# Altium PCB flatsat_2_PCB.PcbDoc (part 2 of 6)
Units mil, origin at the board's own origin, x right, y up, seen from the top; angles counter-clockwise.
Board outline 15748.03 x 9842.52 mil, 4 copper layers (Top Layer, FlatSat GND, FlatSat VCC, Bottom Layer), stack 82.765 mil thick; 155 components, 191 nets, 1391 pads, 1634 vias.
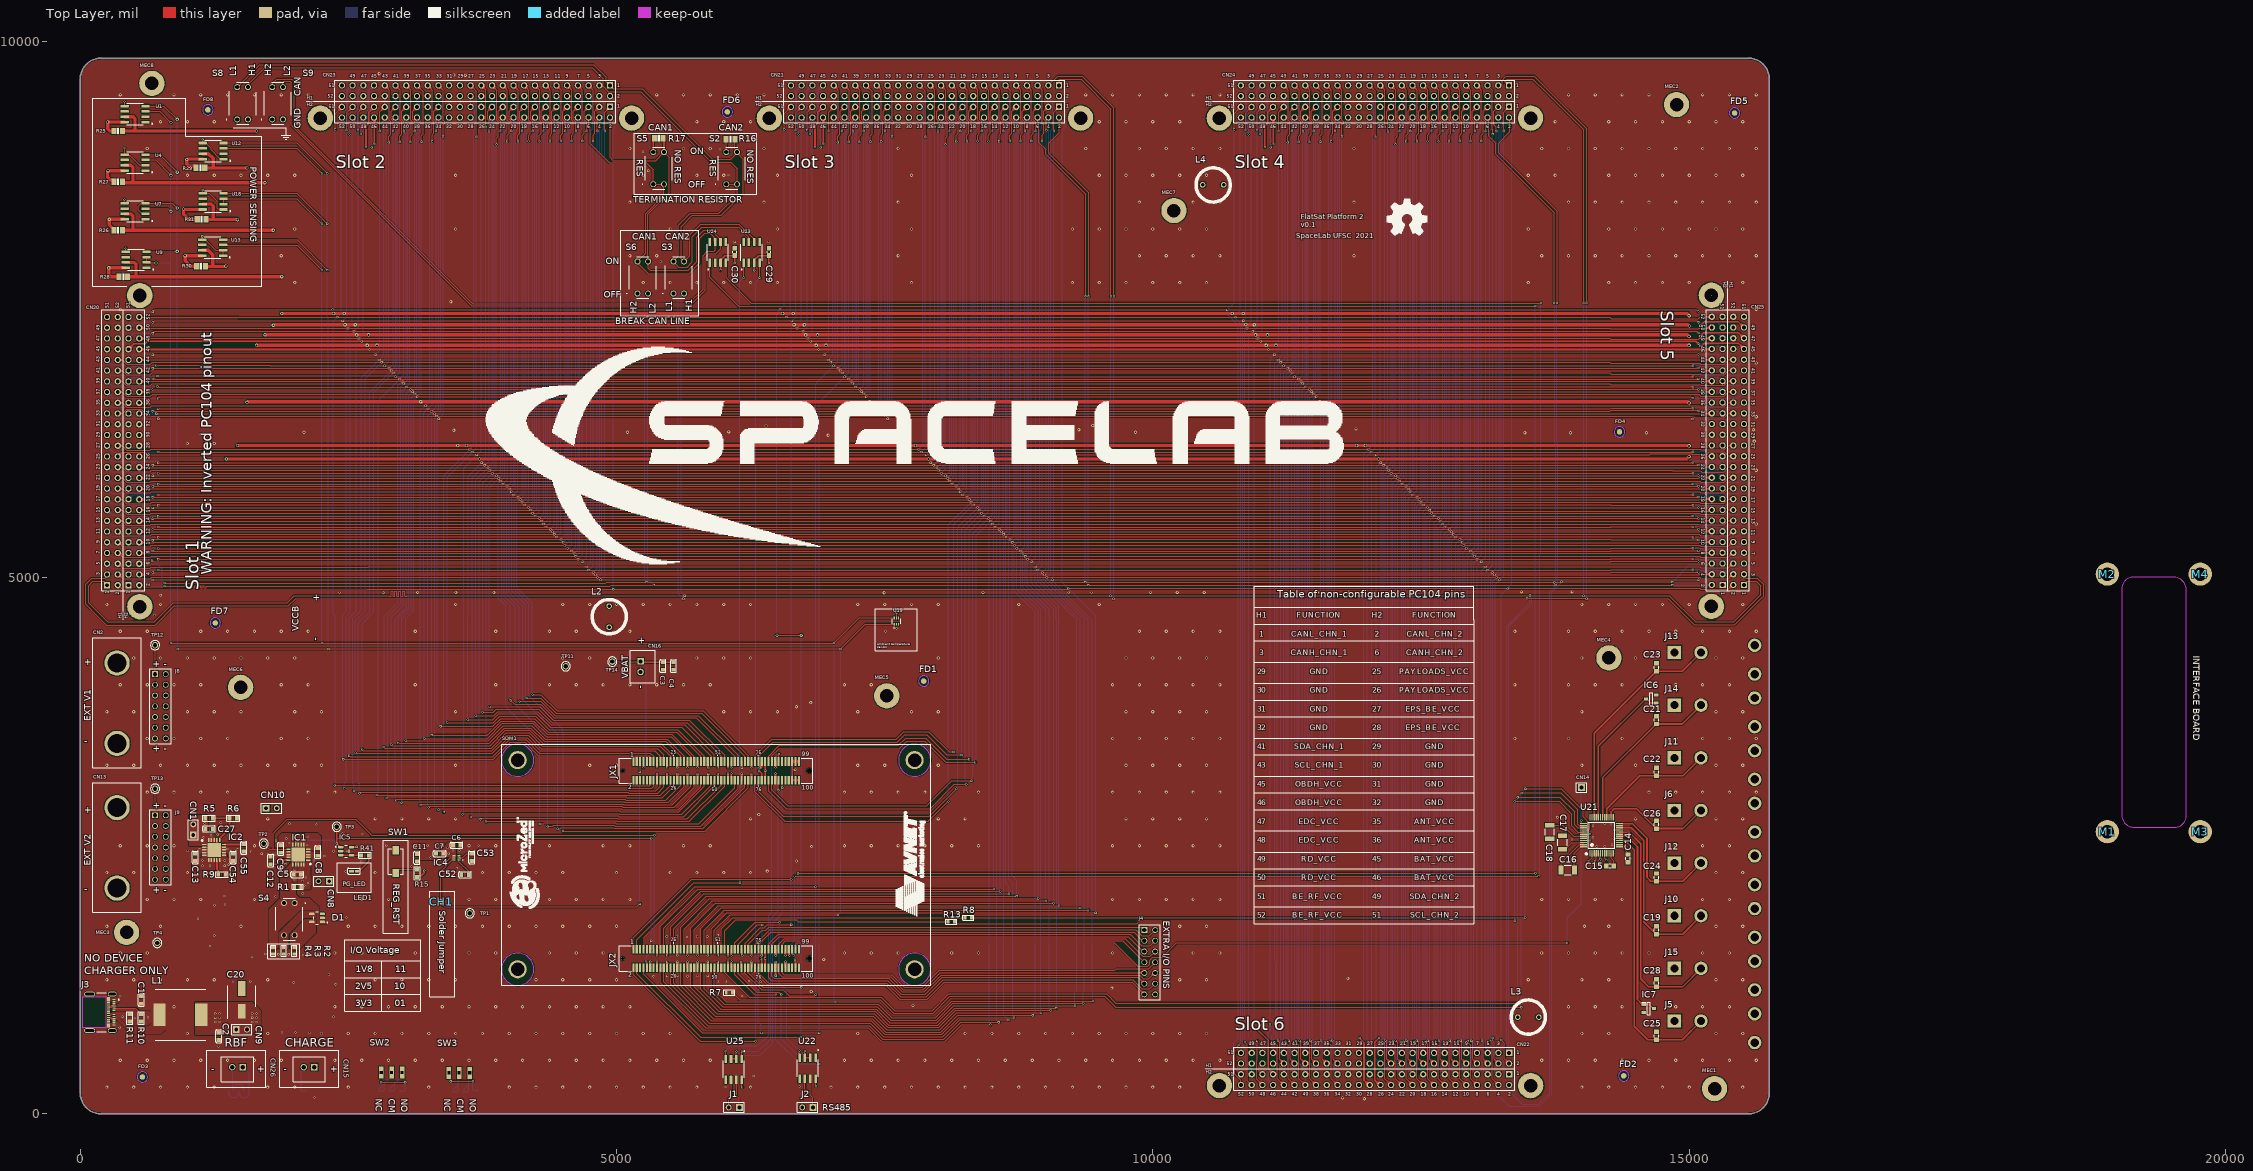
[diagram p0: Top Layer view]

## Part data (continued)
J3: library part CMP-04767-000004-1, "CONN RCP USB3.1 TYPEC 24P SMD RA", Current Rating=0.25/1.25/5A, Manufacturer=Molex, Package=0, Temperature="-30°C to +85°C", Temperature Range High=+85°C, Temperature Range Low=-30°C, Voltage Rating=30V, Automotive=No, Category=Conn, ComponentLink2Description=Datasheet, ComponentLink2URL=https://www.molex.com/webdocs/datasheets/pdf/en-us/1054500101_IO_CONNECTORS.pdf, Conn Orientation="Right Angle", Contact Material=Gold,Nickel, Device Class L1=Connectors, Device Class L2="USB Connectors", Device Class L3=unset, Digikey Description="CONN RCP USB3.1 TYPEC 24P SMD RA", Footprint Url=https://www.molex.com/pdm_docs/sd/1054500101_sd.pdf, Height=3.44mm, Is Female=yes, Lead Free=Yes, Manufacturer Part Number=1054500101, Mouser Description="USB Shielded I/O Receptacle; Type C; Right Angle; Surface Mount; Gold over Nickel", Number of Contacts=24, Octopart=https://octopart.com/105450-0101-molex-68082325, Pitch=0.5mm, RoHS=TRUE, Shielding=true, Usb Standard="USB 3.1"
J4 J8 J9: "Connector Header Surface Mount 14 position 0.079 _2.00mm_", Manufacturer Part Number=TSW-107-05-F-D, Package=None, Availability=Unavailable, MF=Molex, Price=None, SnapEDA_Link=https://www.snapeda.com/parts/87832-1420/Molex/view-part/78740/?ref=snap
J5 J6 J10 J11 J12 J13 J14 J15: library part PCC-SMP-V-K, "Soquete de termopar especial PCCS para placa de circuito em série", ComponentLink1Description=Datasheet, ComponentLink1URL=https://assets.omega.com/spec/PCC-OST-SMP_spec.pdf
L1: "Inductor", Manufacturer_Name="Wurth Elektronik", Mouser Part Number=710-742792901, Manufacturer_Part_Number=742792901, Mouser Price/Stock=https://www.mouser.co.uk/ProductDetail/Wurth-Elektronik/742792901?qs=8K4tMJJn4OFrhST66k9YRg%3D%3D
L2 L3 L4: "3.3ÂµH Unshielded Wirewound Inductor 5.5A 25mOhm Max Radial, Vertical Cylinder", Package="Radial Bourns - J.W. Miller", Availability=Good, Check_prices=https://www.snapeda.com/parts/RL622-3R3K-RC/Bourns/view-part/337281/?ref=eda, Manufacturer Part Number=RL622-3R3K-RC, MF=Bourns, Price=None, Purchase-URL=https://pricing.snapeda.com/search/part/RL622-3R3K-RC/?ref=eda, SnapEDA_Link=https://www.snapeda.com/parts/RL622-3R3K-RC/Bourns/view-part/337281/?ref=snap
M1 M2 M3 M4: "Mechanical Hole for FloripaSat-2 interface boards"
MEC1 MEC2 MEC3 MEC4 MEC5 MEC6 MEC7 MEC8: library part "M3 hole", "M3 hole"
R1 R15: "RES 47K OHM 1/10W 1% 0603", Manufacturer="Stackpole Electronics Inc", Power=1/10W, Supplier Part Number 1=RMCF0603FT47K0CT-ND, Tolerance=1%, Mount Type=SMD, Supplier 1=Digi-Key
R2: "Resistor", Manufacturer_Name=Panasonic, Mouser Part Number=667-ERJ-PB3B2492V, Datasheet Link=https://www.mouser.com/ProductDetail/Panasonic/ERJ-PB3B2492V?qs=RYIBGgAklzKijK5IgOR%2FVg%3D%3D, Height=0.55mm, Manufacturer_Part_Number=ERJ-PB3B2492V, Mouser Price/Stock=https://www.mouser.co.uk/ProductDetail/Panasonic/ERJ-PB3B2492V?qs=RYIBGgAklzKijK5IgOR%2FVg%3D%3D
R3 R4: "Resistor", Manufacturer_Name=Panasonic, Datasheet Link=http://industrial.panasonic.com/cdbs/www-data/pdf/RDQ0000/ast-ind-151033.pdf
  R3: Manufacturer_Part_Number=ERJH3ED3652V
  R4: Manufacturer_Part_Number=ERJ-H3ED3652V
R5 R9: "RES 3.57K OHM 1/10W 1% 0603", Manufacturer="Stackpole Electronics Inc", Power=1/10W, Supplier Part Number 1=RMCF0603FT3K57CT-ND, Tolerance=1%, Mount Type=SMD, Supplier 1=Digi-Key, Supplier 2=Newark, Supplier Part Number 2=89M6753
R6: "Resistor", Manufacturer_Name="TE Connectivity", Mouser Part Number=279-CPF0603F1K15C1, Datasheet Link=https://www.te.com/commerce/DocumentDelivery/DDEController?Action=srchrtrv&DocNm=8-1773459-4_ELEVATOR_ESCALATOR_SOLUTIONS&DocType=Data%20Sheet&DocLang=English&PartCntxt=6-1879336-8&DocFormat=pdf, Height=0.55mm, Manufacturer_Part_Number=CPF0603F1K15C1, Mouser Price/Stock=https://www.mouser.co.uk/ProductDetail/TE-Connectivity-Holsworthy/CPF0603F1K15C1?qs=8G8kQhBkhGik2Xy5fY9yCw%3D%3D
R7 R8 R13: "RES SMD 50 OHM 1% 1/10W 0603", Manufacturer="Vishay Dale", Power=1/10W, Supplier Part Number 1=541-3318-1-ND, Tolerance=1%, Mount Type=SMD, Supplier 1=Digi-Key
R10 R11: "RES 5.1K OHM 1/10W 1% 0603", Manufacturer="Stackpole Electronics Inc", Power=1/10W, Supplier Part Number 1=RMCF0603FT5K10CT-ND, Tolerance=1%, Mount Type=SMD, Supplier 1=Digi-Key
R16 R17: library part R120R_1%_1/4W_0805, "RES 120R OHM 1/8W 1% 0805", Manufacturer Part Number=CRGCQ0805F120R, NCM=8533.21.20
R25 R26 R27 R28 R29 R30 R31: library part RDNP_0805, "RES DNP 0805", Manufacturer Part Number=UR73V2ATTD47L0F, NCM=8533.21.20
R41: "RES SMD 240 OHM 1% 1/10W 0603", Manufacturer=Yageo, Power=1/10W, Supplier Part Number 1=9330860, Tolerance=1%, Mount Type=SMD, Supplier 1=Farnell, Supplier 2=Digi-Key, Supplier 3=Newark, Supplier Part Number 2=311-240HRCT-ND, Supplier Part Number 3=65T8389
S2 S3 S4 S5 S6 S8 S9: "Switch", Manufacturer_Name=Apem, Mouser Part Number=642-NDS02V, Datasheet Link=https://componentsearchengine.com/Datasheets/2/NDS02V.pdf, Height=7.05mm, Manufacturer_Part_Number=NDS02V, Mouser Price/Stock=https://www.mouser.co.uk/ProductDetail/Apem/NDS02V?qs=Rt2YTNbomKgQBAMS%252Bs5rFQ%3D%3D
SOM1: library part MicroZed_SOM, "MicroZed SOM Carrier Footprint", Manufacturer Part Number=61083-101400LF
SW1: "SWITCH TACTILE SPST-NO 0.05A 12V", Manufacturer="Wurth Electronics Inc.", Supplier Part Number 1=2459527, Action=Momentary, Circuit=SPST, Mount Type=SMD, Supplier 1=Farnell, Supplier 2=Digi-Key, Supplier 3=Farnell, Supplier 4=Digi-Key, Supplier 5=Farnell, Supplier 6=Farnell, Supplier Part Number 2=732-7054-1-ND, Supplier Part Number 3=9471898, Supplier Part Number 4=732-7054-6-ND, Supplier Part Number 5=2079577, Supplier Part Number 6=2079521
TP1 TP2 TP3 TP4 TP11 TP12 TP13 TP14: library part "Test Point PTH", "TEST POINT PAD"
U1 U4 U7 U9 U12 U13 U18: "26V, 12-bit, i2c output current/voltage/power monitor 8-SOIC -40 to 125", Package="SOIC-8 Texas Instruments", Availability=Warning, Check_prices=https://www.snapeda.com/parts/INA219AID/Texas%20Instruments/view-part/522322/?ref=eda, Manufacturer Part Number=INA219AID, MF="Texas Instruments", Price=None, Purchase-URL=https://pricing.snapeda.com/search/part/INA219AID/?ref=eda, SnapEDA_Link=https://www.snapeda.com/parts/INA219AID/Texas%20Instruments/view-part/522322/?ref=snap
U19: "0.5C 1.4V to 3.6V digital temperature sensor with I2C/SMBus in 2.56mm2 package 6-SOT-5X3 -40 to 125", Package="SOT-5X3-6 Texas Instruments", Availability=Good, DigiKey-Purchase-URL=https://snapeda.com/shop?store=DigiKey&id=237309, Manufacturer Part Number=TMP112AIDRLT, MF="Texas Instruments", Mouser-Purchase-URL=https://snapeda.com/shop?store=Mouser&id=237309, Price=None, SnapEDA_Link=https://www.snapeda.com/parts/TMP112AIDRLT/Texas%20Instruments/view-part/237309/?ref=snap, Texas_Instruments-Purchase-URL=https://snapeda.com/shop?store=Texas+Instruments&id=237309
U21: "IC SENSOR THERMAL", Package="LQFP -48 Analog Devices", Manufacturer Part Number=LTC2983CLX#PBF, MF="Analog Devices", SnapEDA_Link=https://www.snapeda.com/parts/LTC2983CLX%23PBF/Analog%20Devices/view-part/2895071/?ref=snap
U22 U25: "1/1 Transceiver Half RS422, RS485 8-SOIC", Manufacturer Part Number=ISL83483IBZ-T, Package="SOIC-8 Intersil", Availability=Unavailable, MF="Renesas Electronics", Price=None, SnapEDA_Link=https://www.snapeda.com/parts/ISL83483IBZ-T/Renesas%20Electronics%20America%20Inc./view-part/482105/?ref=snap
U23 U24: "3.3 V CAN Transceiver", Package="SOIC-8 Texas Instruments", Availability=Unavailable, DigiKey-Purchase-URL=https://snapeda.com/shop?store=DigiKey&id=230614, Manufacturer Part Number=SN65HVD232D, MF="Texas Instruments", Mouser-Purchase-URL=https://snapeda.com/shop?store=Mouser&id=230614, Price=None, SnapEDA_Link=https://www.snapeda.com/parts/SN65HVD232D/Texas%20Instruments/view-part/230614/?ref=snap, Texas_Instruments-Purchase-URL=https://snapeda.com/shop?store=Texas+Instruments&id=230614

## Via types
v1: diameter 20, hole 11.81, Top Layer to Bottom Layer, tented both sides, 872 vias
v2: diameter 30, hole 15, Top Layer to Bottom Layer, 690 vias
v3: diameter 30, hole 17.72, Top Layer to Bottom Layer, tented both sides, 72 vias

## Nets (pads, with @x,y where several pads share a name; then routed paths per layer and width w, separated by ;. In a path a pad name is that pad's centre, name@x,y a point inside that pad or via, vN(x,y) a via of type N, cw(c..) or ccw(c..) an arc to the next point about the centre after c; other vN are vias at no path point)
+5V: C2.1 C6.1 C7.1 C8.1 C9.1 C13.1 C20.1 C54.1 CN9.1 CN9.2 IC1.5 IC1.6 IC1.7 IC1.8 IC1.10 IC2.5 IC2.6 IC2.7 IC2.8 IC2.10 IC2.11 IC4.4 IC5.5 L1.2 R9.1 R15.1 SOM1.JX1-57 SOM1.JX1-58 SOM1.JX1-59 SOM1.JX1-60 SOM1.JX2-12 SOM1.JX2-57 SOM1.JX2-58 SOM1.JX2-59 SOM1.JX2-60 TP4.1 | length 684.8
  Top Layer w8: SOM1.JX2-12@5314.96,1362.2 v1(5314.96,1419.7)
  Top Layer w15: IC5.5@2528.54,2487.2 2574.43,2487.2 2577.39,2490.16 v1(2578.74,2490.16) ; R15.1@3141.73,2209.09 3151.95,2219.31 3179.94,2219.31 3208.66,2248.03 v1(3208.66,2267.72) ; C6.1@3474.63,2505.26 C6.1@3474.84,2505.47 ; SOM1.JX2-58@6039.37,1362.2 v1(6039.37,1421.26) ; v1(6039.37,1476.38) SOM1.JX2-57@6039.37,1535.43 ; SOM1.JX1-58@6039.37,3112.2 v1(6039.37,3173.23) ; v1(6039.37,3228.35) SOM1.JX1-57@6039.37,3285.43 ; SOM1.JX2-60@6070.86,1362.2 v1(6070.87,1421.26) ; v1(6070.87,1476.38) SOM1.JX2-59@6070.87,1535.43 ; SOM1.JX1-60@6070.86,3112.2 v1(6070.87,3173.23) ; v1(6070.87,3227.94) SOM1.JX1-59@6070.87,3285.43
  other v1: 1259.84,856.3 1299.21,856.3 1604.81,856.78 1644.18,856.78 1259.84,895.67 1299.21,895.67 1604.81,896.15 1644.18,896.15 1259.84,935.04 1299.21,935.04 1604.81,935.52 1644.18,935.52 1141.73,2312.99 1210.63,2312.99 1348.43,2312.99 1385.83,2322.83 1141.73,2362.2 1348.43,2362.2 3437.01,2429.13 3476.38,2456.69 3425.2,2480.32 2120.92,2507.36 1945.87,2526.57 1921.26,2566.93 2118.11,2582.68
+RBF: CN6.2 CN6.4 CN26.1 | length 616.7
  Top Layer w15: CN26.1@1515.75,436.22 CN26.1@1530.51,421.46
  Bottom Layer w11: CN6.4@1382.87,214.57 1390.92,206.52 1390.92,174.04 1407.48,157.48 1456.69,157.48 1473.25,174.04 1473.25,190.77 CN6.2@1481.3,198.82 ; CN6.2@1481.3,214.57 CN6.2@1481.3,198.82 ; CN26.1@1515.75,436.22 1574.8,377.17 1574.8,177.17 1555.12,157.48 1505.91,157.48 1491.55,171.84 1491.55,188.57 CN6.2@1481.3,198.82
-RBF: CN6.1 CN6.3 CN26.2 | length 419.4
  Bottom Layer w11: CN26.2@1417.32,436.22 1424.7,428.84 1424.7,221.95 CN6.3@1432.09,214.57 1442.33,224.81 1442.33,261.23 1456.69,275.59 1505.91,275.59 1520.26,261.23 1520.26,224.81 CN6.1@1530.51,214.57
BTN_SENSE: C11.2 IC4.5 R15.2 SW1.1 | length 693.5
  Top Layer w9.84: SW1.1@2942.91,2246.06 2942.91,2254.49 2967.52,2279.09 R15.2@3141.73,2279.09 3141.73,2350.39 C11.2@3139.76,2352.36 3415.35,2352.36 3450.35,2387.36 IC4.5@3486.22,2387.36
  Top Layer w15: SW1.1@2942.91,2246.06 2942.91,2236.22 SW1.1@2964.94,2214.19
CAN_CHN_1_N: CN23.1 R16.1 S2.3 S3.3 S8.4 U23.6 | length 7723
  Top Layer w8: S8.4@1464.96,9571.65 1674.04,9780.73 4786.43,9780.73 4904.16,9663 4904.16,9618.4 4908.84,9613.72 4914.63,9613.72 CN23.1@4940.16,9588.19 4965.69,9562.66 4965.69,9561.41 4970.37,9556.72 5239.57,9556.72 5898.65,8897.64 6062.99,8897.64 6123.62,8958.27 6181.1,8900.79 6181.1,8582.45 6013.95,8415.3 5975.01,8376.36 5708.17,8376.36 5604.55,8272.74 5604.55,7973.8 S3.3@5630.71,7947.64 5685.2,8002.12 5685.2,8195.04 5785.87,8295.72 6141.49,8295.72 6273.69,8163.52 6277.03,8163.52 6279.53,8161.02 U23.6@6279.53,8129.92 ; R16.1@6102.99,9084.65 6102.99,8998.02 S2.3@6123.62,8977.39
  Top Layer w15: S2.3@6123.62,8966.54 S2.3@6123.62,8977.39
CAN_CHN_1_P: CN23.3 S2.1 S2.2 S3.4 S8.3 U23.7 | length 7606.5
  Top Layer w8: S8.3@1564.96,9571.65 1572.53,9579.22 1572.53,9604.03 1721.23,9752.73 4774.83,9752.73 4876.16,9651.4 4876.16,9604.29 4869.82,9597.96 4849.93,9597.96 CN23.3@4840.16,9588.19 4849.93,9578.42 4875.3,9578.42 4925,9528.72 5227.97,9528.72 5744.49,9012.2 5786.86,8969.83 ; S3.4@5530.71,7947.64 5576.55,7993.48 5576.55,8283.24 5688.98,8395.67 5954.72,8395.67 6123.62,8564.57 S2.2@6123.62,8666.54 ; S3.4@5531.5,7942.91 5580.71,7893.7 5659.45,7893.7 5708.66,7942.91 5708.66,8179.13 5797.24,8267.72 6137.8,8267.72 6230.89,8174.62 6230.89,8139.19 U23.7@6240.16,8129.92 ; 5786.97,8969.72 5884.05,8872.64 6062.99,8872.64 6123.62,8812.01 S2.2@6123.62,8666.54 ; S2.1@6023.62,8666.54 S2.2@6112.2,8666.54 ; S2.2@6114.61,8664.13 S2.2@6112.2,8666.54 ; S2.2@6112.2,8666.54 S2.2@6123.62,8666.54
CAN_CHN_2_N: CN23.54 R17.1 S5.3 S6.3 S9.3 U24.6 | length 8958.5
  Top Layer w7.99: 5858.27,8019.69 5925.2,8019.69 5969.88,8064.37 U24.6@5969.88,8128.74
  Top Layer w8: S9.3@1889.76,9566.93 1889.76,9617.9 1897.85,9625.98 1956.9,9625.98 1968.5,9614.38 1968.5,9215.14 3650.47,7533.18 5682.79,7533.18 5826.77,7677.17 5826.77,7988.19 5858.27,8019.69 ; CN23.54@4940.16,9288.19 4940.16,8918.11 4970.47,8887.8 5364.17,8887.8 S5.3@5442.91,8966.54 5492.13,8917.32 5492.13,8588.36 5289.59,8385.83 S6.3@5289.59,7958.44 ; S6.3@5295.28,7947.64 5295.28,7883.86 5314.96,7864.17 5669.29,7864.17 5748.03,7942.91 5748.03,8171.69 5812.14,8235.79 5886.45,8235.79 5958.72,8163.52 5962.07,8163.52 5969.88,8155.71 U24.6@5969.88,8128.74
  Top Layer w15: R17.1@5433.7,9094.49 5442.91,9085.28 S5.3@5442.91,8966.54
CAN_CHN_2_P: CN23.58 S5.1 S5.2 S6.4 S9.4 U24.7 | length 8836.8
  Top Layer w7.99: S9.4@1791.34,9571.65 1791.56,9571.87 1791.56,9606.52 1830.71,9645.67 1978.35,9645.67 1996.5,9627.51 ; 5389.38,8666.94 S5.2@5442.51,8666.94 ; 5807.09,7687.01 5807.09,7999.92 5847.91,8040.75 5912.47,8040.75 5921.26,8049.53 U24.7@5921.26,8114.91
  Top Layer w8: 1996.5,9627.51 1996.5,9212.6 3657.92,7551.18 5671.26,7551.18 5807.09,7687.01 ; CN23.58@4740.16,9288.19 4740.16,9206.69 4753.94,9192.91 4753.94,9045.28 4931.1,8868.11 5275.59,8868.11 5342.91,8800.79 S5.1@5342.91,8666.54 5386.25,8666.54 ; S6.4@5195.28,7947.64 5271.59,8023.95 5271.59,8393.28 5442.91,8564.61 S5.2@5442.91,8660.28 ; S6.4@5197.09,7933.07 5208.75,7921.41 5208.75,7921.17 5295.28,7834.65 5679.13,7834.65 5777.56,7933.07 5777.56,8161.62 5823.73,8207.79 5875.83,8207.79 5912.46,8171.15 5912.46,8136.16 U24.7@5919.88,8128.74
CH1: C25.2 J5.2 U21.16 | length 2564.2
  Top Layer w11.81: U21.16@14350.39,2549.21 14388.63,2549.21 14399.61,2549.21
  Top Layer w15: 14399.61,2549.21 14488.19,2460.63 14488.19,816.93 14613.19,691.93 C25.2@14694.88,691.93 14935.99,691.93 J5.2@15110.24,866.18
CH3: IC7.1 IC7.3 U21.18 | length 1819.9
  Top Layer w11.81: U21.18@14350.39,2588.58 14388.63,2588.58 14419.29,2588.58
  Top Layer w15: 14419.29,2588.58 14517.72,2490.16 14517.72,1066.93 14558.68,1025.96 14570.49,1025.96 IC7.1@14576.77,1019.69 14627.95,1019.69 14665.35,982.28 IC7.3@14671.26,982.28

## Text inside footprints (layer, text, board x,y; h text height)
CN22: Top Overlay "3" at 13210.6,639.42 h29.53; Top Overlay "5" at 13110.6,639.42 h29.53; Top Overlay "7" at 13015.6,639.42 h29.53; Top Overlay "9" at 12910.6,639.42 h29.53; Top Overlay "11" at 12805.6,639.42 h29.53; Top Overlay "13" at 12700.6,639.42 h29.53; Top Overlay "15" at 12600.6,639.42 h29.53; Top Overlay "17" at 12505.6,639.42 h29.53; Top Overlay "19" at 12400.6,639.42 h29.53; Top Overlay "21" at 12305.6,639.42 h29.53; Top Overlay "23" at 12200.6,639.42 h29.53; Top Overlay "25" at 12100.6,639.42 h29.53; Top Overlay "27" at 12000.6,639.42 h29.53; Top Overlay "29" at 11900.6,639.42 h29.53; Top Overlay "31" at 11800.6,639.42 h29.53; Top Overlay "33" at 11700.6,639.42 h29.53; Top Overlay "35" at 11595.6,639.42 h29.53; Top Overlay "37" at 11505.6,639.42 h29.53; Top Overlay "39" at 11400.6,639.42 h29.53; Top Overlay "41" at 11300.6,639.42 h29.53; Top Overlay "43" at 11195.6,639.42 h29.53; Top Overlay "45" at 11095.6,639.42 h29.53; Top Overlay "47" at 11000.6,639.42 h29.53; Top Overlay "49" at 10895.6,639.42 h29.53; Top Overlay "4" at 13210.6,169.42 h29.53; Top Overlay "6" at 13110.6,169.42 h29.53; Top Overlay "8" at 13010.6,169.42 h29.53; Top Overlay "10" at 12895.6,169.42 h29.53; Top Overlay "12" at 12795.6,169.42 h29.53; Top Overlay "14" at 12695.6,169.42 h29.53; Top Overlay "16" at 12595.6,169.42 h29.53; Top Overlay "18" at 12495.6,169.42 h29.53; Top Overlay "20" at 12395.6,169.42 h29.53; Top Overlay "22" at 12295.6,169.42 h29.53; Top Overlay "24" at 12195.6,169.42 h29.53; Top Overlay "26" at 12100.6,169.42 h29.53; Top Overlay "28" at 11995.6,169.42 h29.53; Top Overlay "30" at 11895.6,169.42 h29.53; Top Overlay "32" at 11795.6,169.42 h29.53; Top Overlay "34" at 11695.6,169.42 h29.53; Top Overlay "36" at 11595.6,169.42 h29.53; Top Overlay "38" at 11495.6,169.42 h29.53; Top Overlay "40" at 11395.6,169.42 h29.53; Top Overlay "42" at 11295.6,169.42 h29.53; Top Overlay "44" at 11195.6,169.42 h29.53; Top Overlay "46" at 11095.6,169.42 h29.53; Top Overlay "48" at 10995.6,169.42 h29.53; Top Overlay "50" at 10895.6,169.42 h29.53; Top Overlay "51" at 10700.6,554.42 h29.53; Top Overlay "52" at 10690.6,454.42 h29.53; Top Overlay "51" at 10700.6,354.42 h29.53; Top Overlay "52" at 10795.6,169.42 h29.53; Top Overlay "2" at 13315.6,169.42 h29.53; Top Overlay "1" at 13390.6,359.42 h29.53; Top Overlay "1" at 13390.6,554.42 h29.53; Top Overlay "2" at 13390.6,454.42 h29.53; Top Overlay "H2" at 10495.6,374.42 h29.53; Top Overlay "H1" at 10495.6,434.42 h29.53
CN23: Top Overlay "3" at 4829.17,9658.19 h29.53; Top Overlay "5" at 4729.17,9658.19 h29.53; Top Overlay "7" at 4634.17,9658.19 h29.53; Top Overlay "9" at 4529.17,9658.19 h29.53; Top Overlay "11" at 4424.17,9658.19 h29.53; Top Overlay "13" at 4319.17,9658.19 h29.53; Top Overlay "15" at 4219.17,9658.19 h29.53; Top Overlay "17" at 4124.17,9658.19 h29.53; Top Overlay "19" at 4019.17,9658.19 h29.53; Top Overlay "21" at 3924.17,9658.19 h29.53; Top Overlay "23" at 3819.17,9658.19 h29.53; Top Overlay "25" at 3719.17,9658.19 h29.53; Top Overlay "27" at 3619.17,9658.19 h29.53; Top Overlay "29" at 3519.17,9658.19 h29.53; Top Overlay "31" at 3419.17,9658.19 h29.53; Top Overlay "33" at 3319.17,9658.19 h29.53; Top Overlay "35" at 3214.17,9658.19 h29.53; Top Overlay "37" at 3124.17,9658.19 h29.53; Top Overlay "39" at 3019.17,9658.19 h29.53; Top Overlay "41" at 2919.17,9658.19 h29.53; Top Overlay "43" at 2814.17,9658.19 h29.53; Top Overlay "45" at 2714.17,9658.19 h29.53; Top Overlay "47" at 2619.17,9658.19 h29.53; Top Overlay "49" at 2514.17,9658.19 h29.53; Top Overlay "4" at 4829.17,9188.19 h29.53; Top Overlay "6" at 4729.17,9188.19 h29.53; Top Overlay "8" at 4629.17,9188.19 h29.53; Top Overlay "10" at 4514.17,9188.19 h29.53; Top Overlay "12" at 4414.17,9188.19 h29.53; Top Overlay "14" at 4314.17,9188.19 h29.53; Top Overlay "16" at 4214.17,9188.19 h29.53; Top Overlay "18" at 4114.17,9188.19 h29.53; Top Overlay "20" at 4014.17,9188.19 h29.53; Top Overlay "22" at 3914.17,9188.19 h29.53; Top Overlay "24" at 3814.17,9188.19 h29.53; Top Overlay "26" at 3719.17,9188.19 h29.53; Top Overlay "28" at 3614.17,9188.19 h29.53; Top Overlay "30" at 3514.17,9188.19 h29.53; Top Overlay "32" at 3414.17,9188.19 h29.53; Top Overlay "34" at 3314.17,9188.19 h29.53; Top Overlay "36" at 3214.17,9188.19 h29.53; Top Overlay "38" at 3114.17,9188.19 h29.53; Top Overlay "40" at 3014.17,9188.19 h29.53; Top Overlay "42" at 2914.17,9188.19 h29.53; Top Overlay "44" at 2814.17,9188.19 h29.53; Top Overlay "46" at 2714.17,9188.19 h29.53; Top Overlay "48" at 2614.17,9188.19 h29.53; Top Overlay "50" at 2514.17,9188.19 h29.53; Top Overlay "51" at 2319.17,9573.19 h29.53; Top Overlay "52" at 2309.17,9473.19 h29.53; Top Overlay "51" at 2319.17,9373.19 h29.53; Top Overlay "52" at 2414.17,9188.19 h29.53; Top Overlay "2" at 4934.17,9188.19 h29.53; Top Overlay "1" at 5009.17,9378.19 h29.53; Top Overlay "1" at 5009.17,9573.19 h29.53; Top Overlay "2" at 5009.17,9473.19 h29.53; Top Overlay "H2" at 2114.17,9393.19 h29.53; Top Overlay "H1" at 2114.17,9453.19 h29.53
CN24: Top Overlay "3" at 13209.49,9658.19 h29.53; Top Overlay "5" at 13109.49,9658.19 h29.53; Top Overlay "7" at 13014.49,9658.19 h29.53; Top Overlay "9" at 12909.49,9658.19 h29.53; Top Overlay "11" at 12804.49,9658.19 h29.53; Top Overlay "13" at 12699.49,9658.19 h29.53; Top Overlay "15" at 12599.49,9658.19 h29.53; Top Overlay "17" at 12504.49,9658.19 h29.53; Top Overlay "19" at 12399.49,9658.19 h29.53; Top Overlay "21" at 12304.49,9658.19 h29.53; Top Overlay "23" at 12199.49,9658.19 h29.53; Top Overlay "25" at 12099.49,9658.19 h29.53; Top Overlay "27" at 11999.49,9658.19 h29.53; Top Overlay "29" at 11899.49,9658.19 h29.53; Top Overlay "31" at 11799.49,9658.19 h29.53; Top Overlay "33" at 11699.49,9658.19 h29.53; Top Overlay "35" at 11594.49,9658.19 h29.53; Top Overlay "37" at 11504.49,9658.19 h29.53; Top Overlay "39" at 11399.49,9658.19 h29.53; Top Overlay "41" at 11299.49,9658.19 h29.53; Top Overlay "43" at 11194.49,9658.19 h29.53; Top Overlay "45" at 11094.49,9658.19 h29.53; Top Overlay "47" at 10999.49,9658.19 h29.53; Top Overlay "49" at 10894.49,9658.19 h29.53; Top Overlay "4" at 13209.49,9188.19 h29.53; Top Overlay "6" at 13109.49,9188.19 h29.53; Top Overlay "8" at 13009.49,9188.19 h29.53; Top Overlay "10" at 12894.49,9188.19 h29.53; Top Overlay "12" at 12794.49,9188.19 h29.53; Top Overlay "14" at 12694.49,9188.19 h29.53; Top Overlay "16" at 12594.49,9188.19 h29.53; Top Overlay "18" at 12494.49,9188.19 h29.53; Top Overlay "20" at 12394.49,9188.19 h29.53; Top Overlay "22" at 12294.49,9188.19 h29.53; Top Overlay "24" at 12194.49,9188.19 h29.53; Top Overlay "26" at 12099.49,9188.19 h29.53; Top Overlay "28" at 11994.49,9188.19 h29.53; Top Overlay "30" at 11894.49,9188.19 h29.53; Top Overlay "32" at 11794.49,9188.19 h29.53; Top Overlay "34" at 11694.49,9188.19 h29.53; Top Overlay "36" at 11594.49,9188.19 h29.53; Top Overlay "38" at 11494.49,9188.19 h29.53; Top Overlay "40" at 11394.49,9188.19 h29.53; Top Overlay "42" at 11294.49,9188.19 h29.53; Top Overlay "44" at 11194.49,9188.19 h29.53; Top Overlay "46" at 11094.49,9188.19 h29.53; Top Overlay "48" at 10994.49,9188.19 h29.53; Top Overlay "50" at 10894.49,9188.19 h29.53; Top Overlay "51" at 10699.49,9573.19 h29.53; Top Overlay "52" at 10689.49,9473.19 h29.53; Top Overlay "51" at 10699.49,9373.19 h29.53; Top Overlay "52" at 10794.49,9188.19 h29.53; Top Overlay "2" at 13314.49,9188.19 h29.53; Top Overlay "1" at 13389.49,9378.19 h29.53; Top Overlay "1" at 13389.49,9573.19 h29.53; Top Overlay "2" at 13389.49,9473.19 h29.53; Top Overlay "H2" at 10494.49,9393.19 h29.53; Top Overlay "H1" at 10494.49,9453.19 h29.53
CN25: Top Overlay "H1" at 15376.23,7757.28 h29.53 r270; Top Overlay "H2" at 15316.23,7757.28 h29.53 r270; Top Overlay "2" at 15396.23,4862.28 h29.53 r270; Top Overlay "1" at 15496.23,4862.28 h29.53 r270; Top Overlay "1" at 15301.23,4862.28 h29.53 r270; Top Overlay "2" at 15111.23,4937.28 h29.53 r270; Top Overlay "52" at 15111.23,7457.28 h29.53 r270; Top Overlay "51" at 15296.23,7552.28 h29.53 r270; Top Overlay "52" at 15396.23,7562.28 h29.53 r270; Top Overlay "51" at 15496.23,7552.28 h29.53 r270; Top Overlay "50" at 15111.23,7357.28 h29.53 r270; Top Overlay "48" at 15111.23,7257.28 h29.53 r270; Top Overlay "46" at 15111.23,7157.28 h29.53 r270; Top Overlay "44" at 15111.23,7057.28 h29.53 r270; Top Overlay "42" at 15111.23,6957.28 h29.53 r270; Top Overlay "40" at 15111.23,6857.28 h29.53 r270; Top Overlay "38" at 15111.23,6757.28 h29.53 r270; Top Overlay "36" at 15111.23,6657.28 h29.53 r270; Top Overlay "34" at 15111.23,6557.28 h29.53 r270; Top Overlay "32" at 15111.23,6457.28 h29.53 r270; Top Overlay "30" at 15111.23,6357.28 h29.53 r270; Top Overlay "28" at 15111.23,6257.28 h29.53 r270; Top Overlay "26" at 15111.23,6152.28 h29.53 r270; Top Overlay "24" at 15111.23,6057.28 h29.53 r270; Top Overlay "22" at 15111.23,5957.28 h29.53 r270; Top Overlay "20" at 15111.23,5857.28 h29.53 r270; Top Overlay "18" at 15111.23,5757.28 h29.53 r270; Top Overlay "16" at 15111.23,5657.28 h29.53 r270; Top Overlay "14" at 15111.23,5557.28 h29.53 r270; Top Overlay "12" at 15111.23,5457.28 h29.53 r270; Top Overlay "10" at 15111.23,5357.28 h29.53 r270; Top Overlay "8" at 15111.23,5242.28 h29.53 r270; Top Overlay "6" at 15111.23,5142.28 h29.53 r270; Top Overlay "4" at 15111.23,5042.28 h29.53 r270; Top Overlay "49" at 15581.23,7357.28 h29.53 r270; Top Overlay "47" at 15581.23,7252.28 h29.53 r270; Top Overlay "45" at 15581.23,7157.28 h29.53 r270; Top Overlay "43" at 15581.23,7057.28 h29.53 r270; Top Overlay "41" at 15581.23,6952.28 h29.53 r270; Top Overlay "39" at 15581.23,6852.28 h29.53 r270; Top Overlay "37" at 15581.23,6747.28 h29.53 r270; Top Overlay "35" at 15581.23,6657.28 h29.53 r270; Top Overlay "33" at 15581.23,6552.28 h29.53 r270; Top Overlay "31" at 15581.23,6452.28 h29.53 r270; Top Overlay "29" at 15581.23,6352.28 h29.53 r270; Top Overlay "27" at 15581.23,6252.28 h29.53 r270; Top Overlay "25" at 15581.23,6152.28 h29.53 r270; Top Overlay "23" at 15581.23,6052.28 h29.53 r270; Top Overlay "21" at 15581.23,5947.28 h29.53 r270; Top Overlay "19" at 15581.23,5852.28 h29.53 r270; Top Overlay "17" at 15581.23,5747.28 h29.53 r270; Top Overlay "15" at 15581.23,5652.28 h29.53 r270; Top Overlay "13" at 15581.23,5552.28 h29.53 r270; Top Overlay "11" at 15581.23,5447.28 h29.53 r270; Top Overlay "9" at 15581.23,5342.28 h29.53 r270; Top Overlay "7" at 15581.23,5237.28 h29.53 r270; Top Overlay "5" at 15581.23,5142.28 h29.53 r270; Top Overlay "3" at 15581.23,5042.28 h29.53 r270
SOM1: Top Overlay "JX1" at 4996.13,3125.32 h60 r90; Top Overlay "JX2" at 4992.13,1368.32 h60 r90; Top Overlay "50" at 5887.72,1259.81 h30; Top Overlay "76" at 6297.72,1259.81 h30; Top Overlay "75" at 6297.72,1604.81 h30; Top Overlay "51" at 5922.72,1609.81 h30; Top Overlay "26" at 5507.72,1269.81 h30; Top Overlay "25" at 5507.72,1609.81 h30; Top Overlay "1" at 5127.13,1581.83 h40; Top Overlay "2" at 5108.13,1278.83 h40; Top Overlay "99" at 6727.72,1584.81 h40; Top Overlay "100" at 6727.72,1269.81 h40; Top Overlay "100" at 6727.72,3019.81 h40; Top Overlay "99" at 6727.72,3334.81 h40; Top Overlay "2" at 5108.13,3028.83 h40; Top Overlay "1" at 5127.13,3331.83 h40; Top Overlay "25" at 5507.72,3359.81 h30; Top Overlay "26" at 5507.72,3019.81 h30; Top Overlay "51" at 5922.72,3359.81 h30; Top Overlay "75" at 6297.72,3354.81 h30; Top Overlay "76" at 6297.72,3009.81 h30; Top Overlay "50" at 5887.72,3009.81 h30